# Altium PCB PCB.PcbDoc
Units mil, origin at the board's own origin, x right, y up, seen from the top; angles counter-clockwise.
Board outline 3039.37 x 5511.81 mil, 4 copper layers (Top Layer, VCC, GND, Bottom Layer), stack 23.756 mil thick; 30 components, 63 nets, 203 pads, 0 vias.
Unrouted connection lines stored in the file: 90.
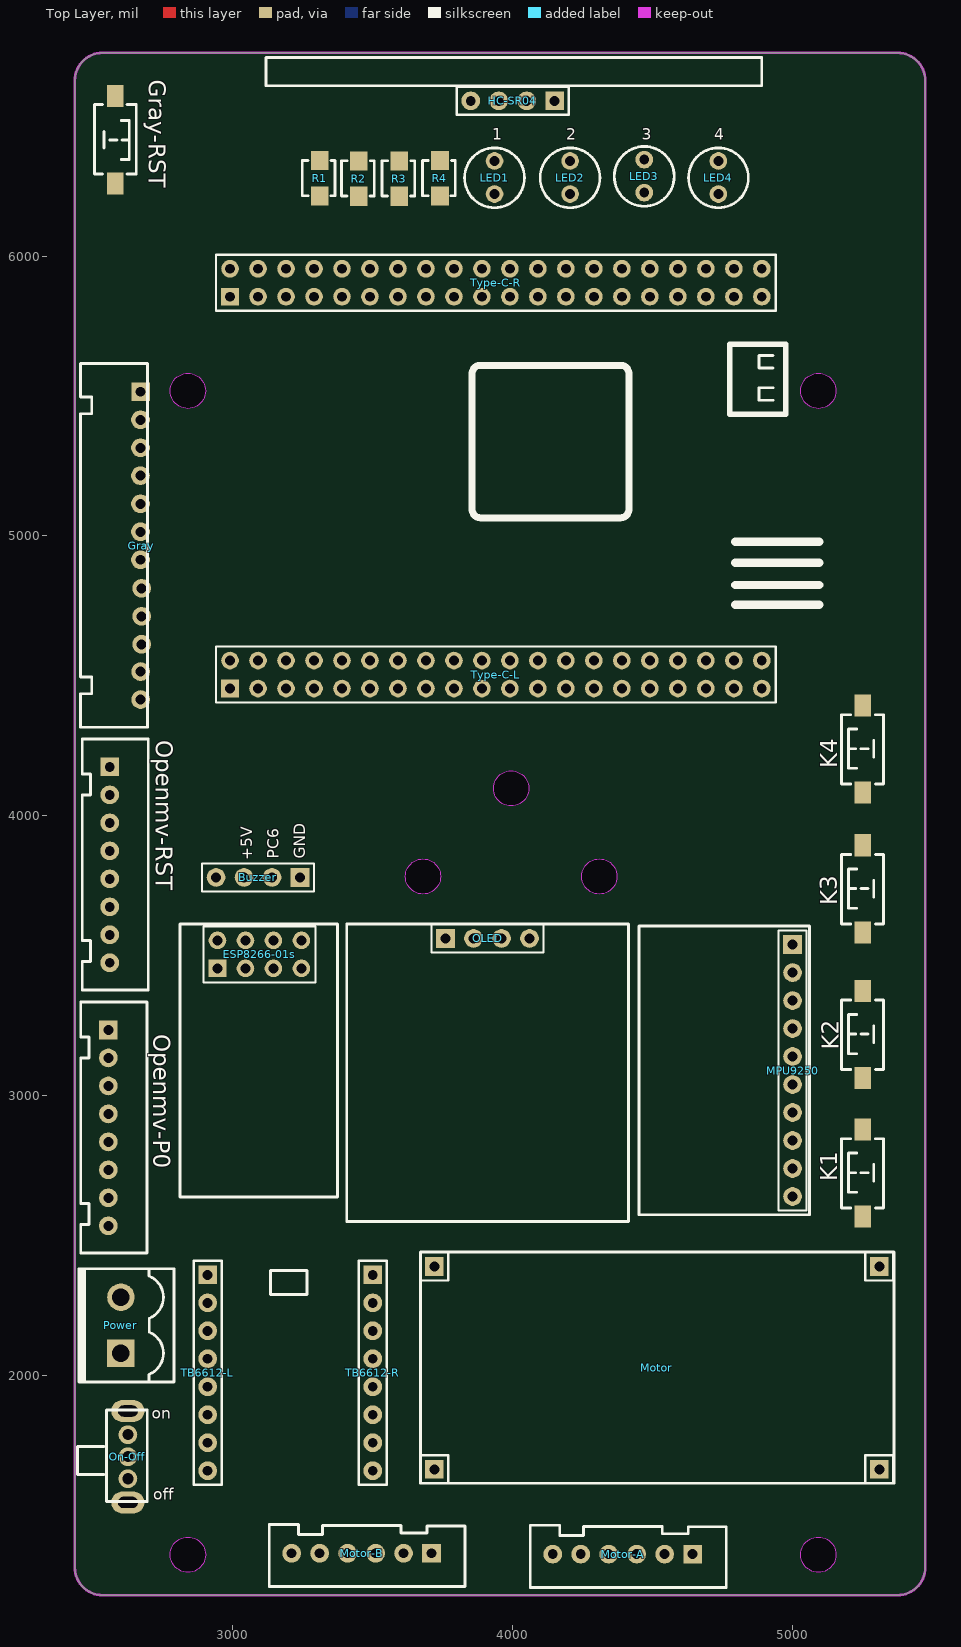
[diagram p0: Top Layer view]
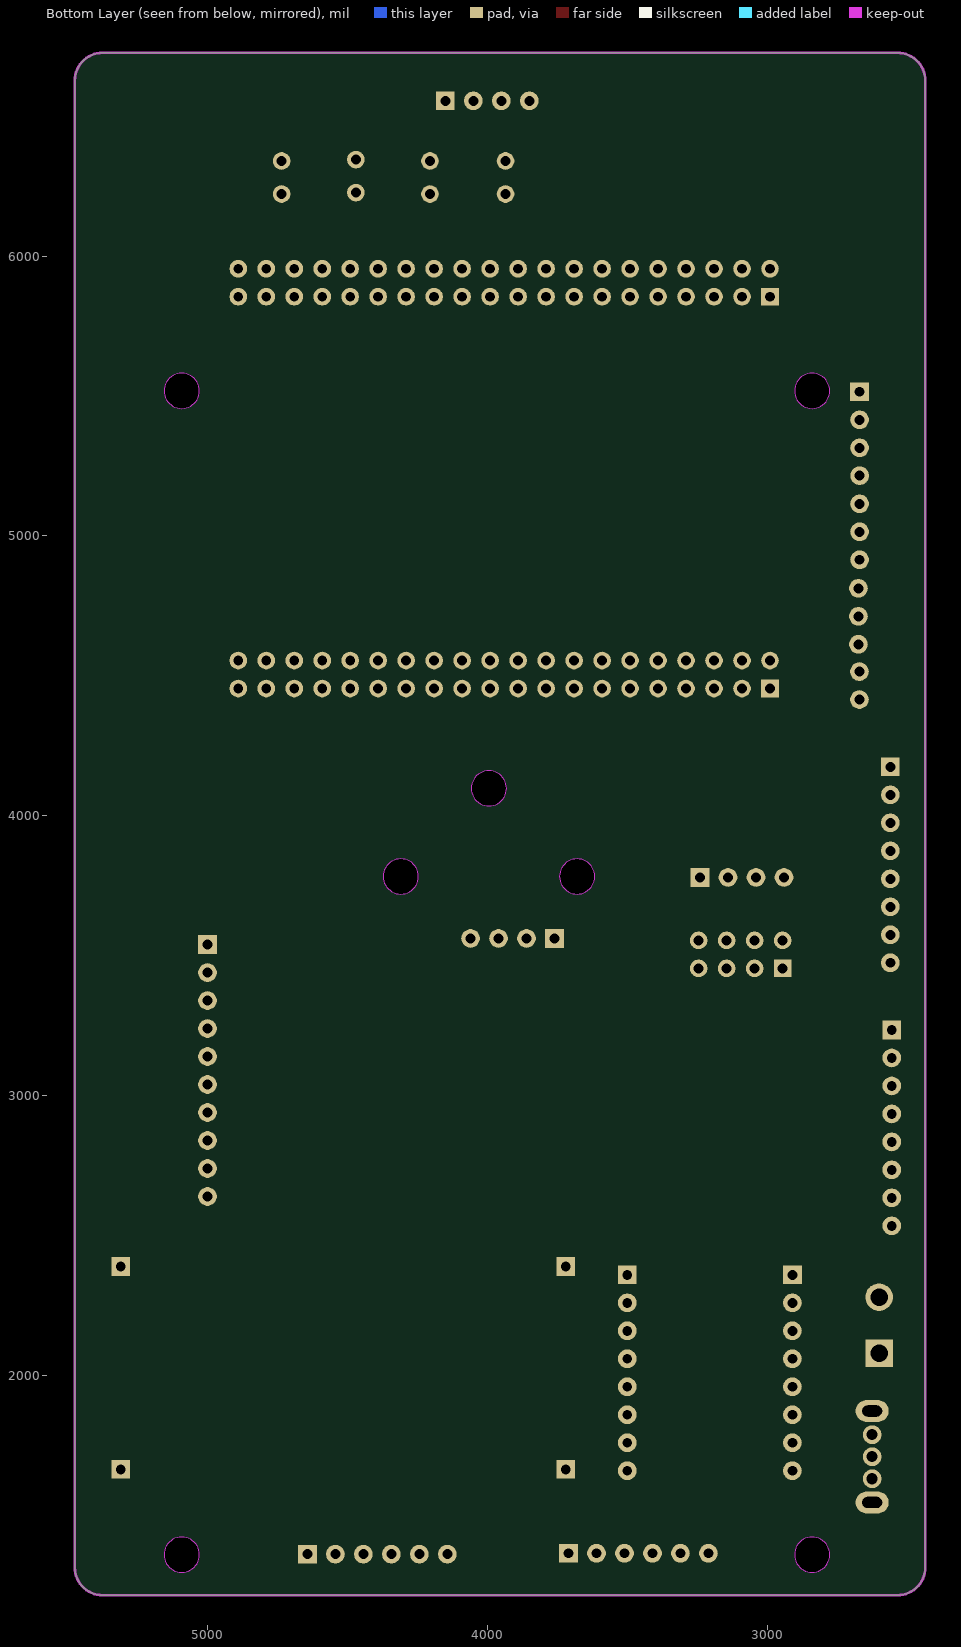
[diagram p1: Bottom Layer view, seen from below]

## Layer stack, top to bottom
Top Solder: solder mask 0.4, Solder Resist, Dk 3.5
Top Layer: signal copper 1.4
Dielectric 2: prepreg 2.8, PP-006, Dk 4.1
VCC: signal copper 1.378
Dielectric 1: prepreg 12.6, FR-4, Dk 4.8
GND: signal copper 1.378
Dielectric 3: prepreg 2.8, PP-006, Dk 4.1
Bottom Layer: signal copper 1.4
Bottom Solder: solder mask 0.4, Solder Resist, Dk 3.5

## Board outline
2435,1315 2435,6626.81 cw(c2535,6626.81) 2535,6726.81 5374.37,6726.81 cw(c5374.37,6626.81) 5474.37,6626.81 5474.37,1315 cw(c5374.37,1315) 5374.37,1215 2535,1215 cw(c2535,1315)
cut-out: 3679.43,3720.38 cw(c3679.43,3783.37) 3616.44,3783.37 cw(c3679.43,3783.37) 3679.43,3846.37 cw(c3679.43,3783.37) 3742.42,3783.37 cw(c3679.43,3783.37)
cut-out: 3994.39,4035.34 cw(c3994.39,4098.33) 3931.4,4098.33 cw(c3994.39,4098.33) 3994.39,4161.33 cw(c3994.39,4098.33) 4057.38,4098.33 cw(c3994.39,4098.33)
cut-out: 4309.35,3720.38 cw(c4309.35,3783.37) 4246.36,3783.37 cw(c4309.35,3783.37) 4309.35,3846.37 cw(c4309.35,3783.37) 4372.34,3783.37 cw(c4309.35,3783.37)
cut-out: 5092.01,1296.85 cw(c5092.01,1359.85) 5029.02,1359.85 cw(c5092.01,1359.85) 5092.01,1422.84 cw(c5092.01,1359.85) 5155,1359.85 cw(c5092.01,1359.85)
cut-out: 2839.43,1296.85 cw(c2839.43,1359.85) 2776.44,1359.85 cw(c2839.43,1359.85) 2839.43,1422.84 cw(c2839.43,1359.85) 2902.42,1359.85 cw(c2839.43,1359.85)
cut-out: 5092.01,5455.38 cw(c5092.01,5518.37) 5029.02,5518.37 cw(c5092.01,5518.37) 5092.01,5581.37 cw(c5092.01,5518.37) 5155,5518.37 cw(c5092.01,5518.37)
cut-out: 2839.43,5455.38 cw(c2839.43,5518.37) 2776.44,5518.37 cw(c2839.43,5518.37) 2839.43,5581.37 cw(c2839.43,5518.37) 2902.42,5518.37 cw(c2839.43,5518.37)

## Design rules (kind name [scope] priority, off if disabled: settings)
Clearance [All] p1: gap=10 ignorepadtopadclearanceinfootprint=FALSE except(0: Arc-Hole Track-Hole SMDPad-Hole THPad-Hole Via-Hole Fill-Hole Poly-Hole Region-Hole Text-Hole)
PolygonConnect [All] p1: connectstyle=Relief reliefconductorwidth=10 reliefentries=4 polygonreliefangle="90 Angle" airgapwidth=10
RoutingVias [All] p1: holewidth=28 width=50 viastyle="Through Hole" minholewidth=28 minwidth=50 maxholewidth=28 maxwidth=50
SolderMaskExpansion [All] p1: expansion=4 istentingtop=FALSE
Width [All] p1: maxlimit=60 minlimit=12 preferedwidth=12 minimp=50.000000 maximp=50.000000 favimp=50.000000
30 further rules are at their usual default settings.

## Components (designator, comment, footprint, x,y, rotation, side; value= is the part's Value field where it differs from the comment)
Buzzer "" HDR2.54-M-LI-4P 3090,3780 r180 top
ESP8266-01s "" ESP8266-01s 2575,3315 r90 top
Gray "" XH2.54-1*12P 2560.13,5016.5 r0 top
Gray-RST "" 贴片按键8mm 2580,6415 r270 top
HC-SR04 "" HC-SR04 3900,6665 r270 top
K1 "" 贴片按键8mm 5250,2725 r90 top
K2 "" 贴片按键8mm 5250,3220 r90 top
K3 "" 贴片按键8mm 5250,3740 r90 top
K4 "" 贴片按键8mm 5250,4240 r90 top
LED1 "" LED-3mm 3935,6340 r270 top
LED2 "" LED-3mm 4205,6340 r270 top
LED3 "" LED-3mm 4470,6345 r270 top
LED4 "" LED-3mm 4735,6340 r270 top
Motor "12V-5V" 12V-5V-Blue 3670,1775 r0 top
Motor-A "" XH2.54-1*6P直 4450,1260 r90 top
Motor-B "" XH2.54-1*6P直 3517,1263 r90 top
MPU9250 "" MPU9250 4995,3305 r0 top
OLED "" OLED 3760,3555 r90 top
On-Off "" 拨动开关 2625,1546.6 r90 top
Openmv-P0 "" XH2.54-1*8P 2575,2965 r0 top
Openmv-RST "" XH2.54-1*8P 2580,3905 r0 top
Power "" 立插端子-2P 2600,2180 r90 top
R1 "" 120Ω 3310,6215 r90 top
R2 "" 120Ω 3450,6214.02 r90 top
R3 "" 120Ω 3595,6214.02 r90 top
R4 "" 120Ω 3740,6215 r90 top
TB6612-L "" 排母-1*8P 2890,2035 r0 top
TB6612-R "" 排母-1*8P 3480,2035 r0 top
Type-C-L "" 排母2*20P 3695,4530 r90 top
Type-C-R "" 排母2*20P 3695,5930 r90 top

## Footprints (in the part's own frame and the unit in brackets; to place one, negate y for a bottom-side part, rotate by r counter-clockwise, add the part's x,y. Pads: shape width x height; smd on the part's side, far side on the other; paste and mask are expansions set on the pad)
12V-5V-Blue [mm] "降压模块(蓝色版本)"
  rect 1.7x1.7 hole 0.9: 1(1.27,15.621) 2(1.27,-2.794) 3(41.656,15.621) 4(41.656,-2.794)
  silkscreen extent 0,-4.06 43,16.94, body extent 0,-4.06 42.93,16.89, height 8.5
120Ω [mm] "1206封装"
  rect 1.727x1.6 smd: 1(0,0) 2(3.2,0)
  silkscreen extent 0.03,-1.4 3.23,1.57
ESP8266-01s [mm] "WIFI模块"
  rect 1.6x1.6 hole 0.9: 1(3.556,-9.398)
  round 1.6 hole 0.9: 2(3.556,-11.938) 3(3.556,-14.478) 4(3.556,-17.018) 5(6.096,-9.398) 6(6.096,-11.938) 7(6.096,-14.478) 8(6.096,-17.018)
  silkscreen extent -17.21,-20.29 7.59,-5.99, body extent 2.29,-18.29 7.37,-8.13, height 8.5
HC-SR04 [mm] "超声波模块"
  rect 1.7x1.7 hole 0.9: 1(2.794,6.35)
  round 1.7 hole 0.9: 2(2.794,3.81) 3(2.794,1.27) 4(2.794,-1.27)
  silkscreen extent -1.14,-19.85 4.06,25.15, body extent 1.52,-2.54 4.06,7.62, height 8.5
HDR2.54-M-LI-4P [mm]
  rect 1.7x1.7 hole 0.9: 1(-3.81,0)
  round 1.7 hole 0.9: 2(-1.27,0) 3(1.27,0) 4(3.81,0)
  silkscreen extent -5.08,-1.27 5.08,1.27, body extent -5.08,-1.27 5.08,1.27, height 8.5
LED-3mm [mm]
  round 1.6 hole 0.9: 1(0,0) 2(3,0)
  silkscreen extent -1.19,-2.71 4.24,2.71
MPU9250 [mm] "姿态解算"
  rect 1.7x1.7 hole 0.9: 1(0.127,5.969)
  round 1.7 hole 0.9: 2(0.127,3.429) 3(0.127,0.889) 4(0.127,-1.651) 5(0.127,-4.191) 6(0.127,-6.731) 7(0.127,-9.271) 8(0.127,-11.811) 9(0.127,-14.351) 10(0.127,-16.891)
  silkscreen extent -13.82,-18.54 1.68,7.66, body extent -1.14,-18.16 1.4,7.24, height 8.5
OLED [mm] "OLED"
  rect 1.7x1.7 hole 0.9: 1(0.178,0)
  round 1.7 hole 0.9: 2(0.178,-2.54) 3(0.178,-5.08) 4(0.178,-7.62)
  silkscreen extent -25.5,-16.61 1.5,8.97, body extent -1.09,-8.89 1.45,1.27, height 8.5
XH2.54-1*6P直 [mm] "接插件，6P,直"
  round 1.7 hole 0.9: 1(2.591,7.798) 2(2.591,5.258) 3(2.591,2.718) 4(2.591,0.178) 5(2.591,-2.362)
  rect 1.7x1.7 hole 0.9: 6(2.591,-4.902)
  silkscreen extent -0.43,-7.95 5.21,9.83, body extent -0.56,-7.88 5.14,9.82, height 7.03
XH2.54-1*8P [mm] "接插件，8P"
  rect 1.7x1.7 hole 0.9: 1(-0.508,6.858)
  round 1.7 hole 0.9: 2(-0.508,4.318) 3(-0.508,1.778) 4(-0.508,-0.762) 5(-0.508,-3.302) 6(-0.508,-5.842) 7(-0.508,-8.382) 8(-0.508,-10.922)
  silkscreen extent -3.01,-13.39 2.99,9.4, body extent -2.91,-13.42 2.79,9.36, height 2.55
XH2.54-1*12P [mm] "接插件，12P"
  rect 1.7x1.7 hole 0.9: 1(2.803,12.675)
  round 1.7 hole 0.9: 2(2.791,10.122) 3(2.791,7.582) 4(2.785,5.055) 5(2.791,2.502) 6(2.791,-0.038) 7(2.791,-2.578) 8(2.892,-5.169) 9(2.892,-7.709) 10(2.892,-10.249) 11(2.803,-12.725) 12(2.803,-15.265)
  silkscreen extent -2.66,-17.78 3.44,15.24, body extent -2.48,-17.82 3.22,15.12, height 2.55
拨动开关 [mm] "脚距3mm"
  oval 1.999x3 hole 1.001 slot 1.801 at 90 deg: 1(0,0) 5(8.301,0)
  round 1.7 hole 1.001: 2(2.151,0) 3(4.15,0) 4(6.149,0)
  silkscreen extent 0.1,-1.75 8.38,4.57
排母2*20P [mm] "排母2*20P"
  rect 1.6x1.6 hole 0.9: 1(-1.905,17.907)
  round 1.6 hole 0.9: 2(0.635,17.907) 3(-1.905,15.367) 4(0.635,15.367) 5(-1.905,12.827) 6(0.635,12.827) 7(-1.905,10.287) 8(0.635,10.287) 9(-1.905,7.747) 10(0.635,7.747) 11(-1.905,5.207) 12(0.635,5.207) 13(-1.905,2.667) 14(0.635,2.667) 15(-1.905,0.127) 16(0.635,0.127) 17(-1.905,-2.413) 18(0.635,-2.413) 19(-1.905,-4.953) 20(0.635,-4.953) 21(-1.905,-7.493) 22(0.635,-7.493) 23(-1.905,-10.033) 24(0.635,-10.033) 25(-1.905,-12.573) 26(0.635,-12.573) 27(-1.905,-15.113) 28(0.635,-15.113) 29(-1.905,-17.653) 30(0.635,-17.653) 31(-1.905,-20.193) 32(0.635,-20.193) 33(-1.905,-22.733) 34(0.635,-22.733) 35(-1.905,-25.273) 36(0.635,-25.273) 37(-1.905,-27.813) 38(0.635,-27.813) 39(-1.905,-30.353) 40(0.635,-30.353)
  silkscreen extent -3.18,-31.62 1.91,19.18, body extent -3.18,-31.62 1.91,19.18, height 8.5
排母-1*8P [mm] "排母-1*8P"
  rect 1.7x1.7 hole 0.9: 1(0.508,8.255)
  round 1.7 hole 0.9: 2(0.508,5.715) 3(0.508,3.175) 4(0.508,0.635) 5(0.508,-1.905) 6(0.508,-4.445) 7(0.508,-6.985) 8(0.508,-9.525)
  silkscreen extent -0.76,-10.79 1.78,9.53, body extent -0.76,-10.79 1.78,9.53, height 8.5
立插端子-2P [mm] "立插端子"
  rect 2.5x2.5 hole 1.6: 1(-2.54,0)
  round 2.5 hole 1.6: 2(2.54,0)
  silkscreen extent -5.16,-4.83 5.13,3.81, body extent -5.08,-4.75 5.08,3.75, height 11.25
贴片按键8mm [mm] "3*6*2.5mm"
  rect 2x1.5 smd: 1(-3.996,-0.02) 2(3.937,0)
  silkscreen extent -3.21,-1.9 3.09,1.9, body extent -4,-1.88 4,1.62, height 2.59

## Part data
Buzzer: library part "Header 4", "4P接插件", BOM名称=4P接插件, 学习资源=www.ooocke.com, 版权归属=源创客
ESP8266-01s: library part 2*4P, "2*4P排母"
Gray: library part 1*12P, "1*12P排母"
Gray-RST K1 K2 K3 K4: library part Button-12X12-pin2, "12x12按键"
HC-SR04 OLED: library part 1*4P, "1*4P排母"
LED1 LED2 LED3 LED4: library part D-LED-M3, "普通M3发光二极管"
Motor: library part 12V转5V, "降压模块12V转5V"
Motor-A Motor-B: library part 1*6P, "1*6P排母"
MPU9250: library part 1*10P, "1*10P排母"
On-Off: library part 拨动开关, "2.54mm间距，拨动开关"
Openmv-P0 Openmv-RST TB6612-L TB6612-R: library part 1*8P, "1*8P排母"
Power: library part Power, "电源引脚"
R1 R2 R3 R4: library part R-0805, "1206"
Type-C-L Type-C-R: library part 2*20P, "2*20P排母"

## Nets (pads, with @x,y where several pads share a name; then routed paths per layer and width w, separated by ;. In a path a pad name is that pad's centre, name@x,y a point inside that pad or via, vN(x,y) a via of type N, cw(c..) or ccw(c..) an arc to the next point about the centre after c; other vN are vias at no path point)
3.3V: Type-C-R.38
5V: Buzzer.3 Gray.11 Motor-A.5 Motor-B.5 Motor.3 OLED.2 Openmv-RST.2 Type-C-L.40
+3.3V: ESP8266-01s.5 MPU9250.10 TB6612-L.2 TB6612-R.4 Type-C-L.38
+5V: HC-SR04.1 Type-C-R.40
+12V: On-Off.3 Power.1
A01: Motor-A.1 TB6612-L.4
A02: Motor-A.6 TB6612-L.5
AGND: Motor-A.2 Motor-B.2 Type-C-L.37
AIN1: TB6612-R.3 Type-C-L.16
AIN2: TB6612-R.2 Type-C-L.18
B01: Motor-B.6 TB6612-L.7
B02: Motor-B.1 TB6612-L.6
BGND: Type-C-R.37
BIN1: TB6612-R.6 Type-C-L.22
BIN2: TB6612-R.7 Type-C-L.20
CGND: Buzzer.1 ESP8266-01s.4 Gray.12 K1.2 K2.2 K3.2 K4.2 Motor.2 Motor.4 MPU9250.9 OLED.1 On-Off.1 Openmv-RST.1 Power.2 TB6612-L.3 TB6612-L.8 TB6612-R.8 Type-C-L.39
GND: Gray-RST.2 HC-SR04.4 LED1.2 LED2.2 LED3.2 LED4.2 Type-C-R.39
IIC1-SCL: OLED.3 Type-C-R.21
IIC1-SDA: OLED.4 Type-C-R.20
IIC2-SCL: Openmv-RST.3 Type-C-L.23
IIC2-SDA: Openmv-RST.4 Type-C-L.24
IIC3-SCL: MPU9250.8 Type-C-R.34
IIC3-SDA: MPU9250.7 Type-C-R.2
INT: MPU9250.3 Type-C-R.30
Key: Gray-RST.1 Gray.10
L1: Gray.1 Type-C-R.1
L2: Gray.2 Type-C-R.3
L3: Gray.3 Type-C-R.5
L4: Gray.4 Type-C-R.7
L5: Gray.5 Type-C-R.9
L6: Gray.6 Type-C-R.11
L7: Gray.7 Type-C-R.13
L8: Gray.8 Type-C-R.15
LED1: R1.1 Type-C-R.12
LED2: R2.1 Type-C-R.14
LED3: R3.1 Type-C-R.16
LED4: R4.1 Type-C-R.18
NetLED1_1: LED1.1 R1.2
NetLED2_1: LED2.1 R2.2
NetLED3_1: LED3.1 R3.2
NetLED4_1: LED4.1 R4.2
PA2: K1.1 Type-C-L.1
PA4: K3.1 Type-C-L.5
PC4: K2.1 Type-C-L.9
PC6: Buzzer.2 Type-C-R.35
PE7: K4.1 Type-C-L.13
SPI2-MISO: Openmv-P0.2 Type-C-L.28
SPI2-MOSI: Openmv-P0.1 Type-C-L.27
SPI2-NSS: Openmv-P0.4 Type-C-L.26
SPI2-SCK: Openmv-P0.3 Type-C-L.25
TIM1-CH1: Motor-B.4 Type-C-L.15
TIM1-CH2: Motor-B.3 Type-C-L.17
TIM3-CH1: Motor-A.4 Type-C-L.7
TIM3-CH2: Motor-A.3 Type-C-L.10
TIM4-CH2: TB6612-R.1 Type-C-L.33
TIM4-CH4: TB6612-R.5 Type-C-L.35
TIM9-CH1: HC-SR04.3 Type-C-R.10
Trig: HC-SR04.2 Type-C-R.8
UART2-RX: ESP8266-01s.8 Type-C-R.28
UART2-TX: ESP8266-01s.1 Type-C-R.29
UART3-RX: Openmv-P0.5 Type-C-L.29
UART3-TX: Openmv-P0.6 Type-C-L.30
VDD: Motor.1 On-Off.4 TB6612-L.1
pads on no net: Buzzer.4 ESP8266-01s.2 ESP8266-01s.3 ESP8266-01s.6 ESP8266-01s.7 Gray.9 MPU9250.1 MPU9250.2 MPU9250.4 MPU9250.5 MPU9250.6 On-Off.2 On-Off.5 Openmv-P0.7 Openmv-P0.8 Openmv-RST.5 Openmv-RST.6 Openmv-RST.7 Openmv-RST.8 Type-C-L.2 Type-C-L.3 Type-C-L.4 Type-C-L.6 Type-C-L.8 Type-C-L.11 Type-C-L.12 Type-C-L.14 Type-C-L.19 Type-C-L.21 Type-C-L.31 Type-C-L.32 Type-C-L.34 Type-C-L.36 Type-C-R.4 Type-C-R.6 Type-C-R.17 Type-C-R.19 Type-C-R.22 Type-C-R.23 Type-C-R.24 Type-C-R.25 Type-C-R.26 Type-C-R.27 Type-C-R.31 Type-C-R.32 Type-C-R.33 Type-C-R.36

## Keep-outs
Keep-Out Layer:
  the board outline again, w10

## Silkscreen, mask and mechanical layers (free items; w line width, h text height)
Top Overlay:
  lines w10: 4930,5485 4880,5485 4880,5530 4930,5530 ; 4930,5600 4880,5600 4880,5645 4930,5645 ; 3135,2290 3265,2290 3265,2375 3135,2375 3135,2290
  lines w20: 4775,5435 4975,5435 4975,5685 4775,5685 4775,5435
  lines w25: 3855,5095 ccw(c3885,5095) 3885,5065 4385,5065 ccw(c4385,5095) 4415,5095 4415,5580 ccw(c4385,5580) 4385,5610 3885,5610 ccw(c3885,5580) 3855,5580 3855,5095
  lines w30: 4795,4755 5095,4755 ; 4795,4825 5095,4825 ; 4795,4905 5095,4905 ; 4795,4980 5095,4980
  text "1" at 3926,6416 h40
  text "2" at 4191,6416 h40
  text "3" at 4461,6416 h40
  text "4" at 4721,6416 h40
  text "PC6" at 3164,3846 h40 r90
  text "GND" at 3259,3846 h40 r90
  text "+5V" at 3069,3841 h40 r90
  text "on" at 2711,1846 h40
  text "off" at 2716,1556 h40